# Altium PCB PCB1.PcbDoc
Units mm, origin at the board's own origin, x right, y up, seen from the top; angles counter-clockwise.
Board outline 50 x 45 mm, 2 copper layers (Top Layer, Bottom Layer); 24 components, 15 nets, 51 pads, 4 vias.
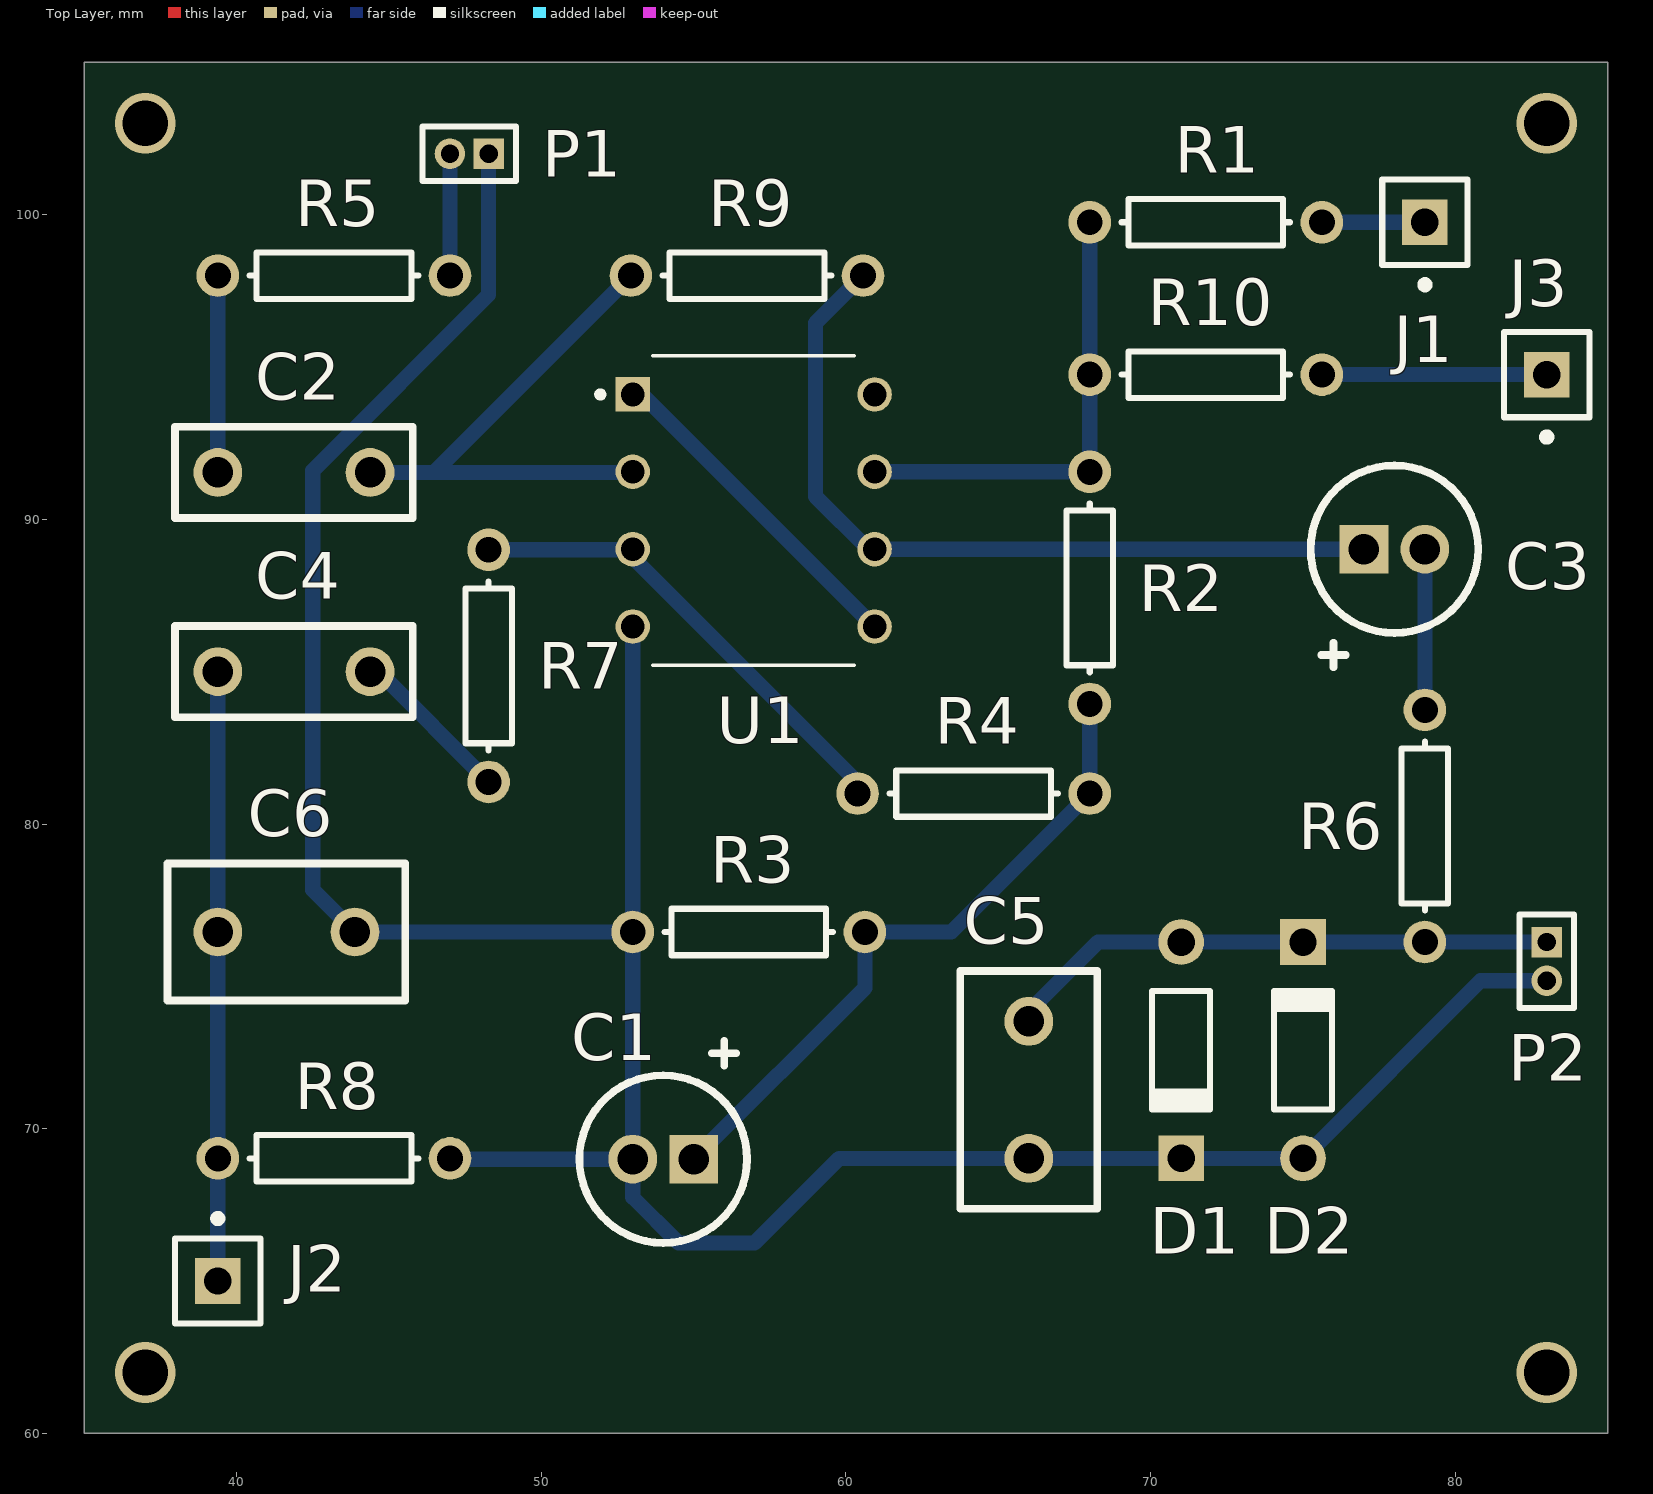
[diagram p0: Top Layer view]
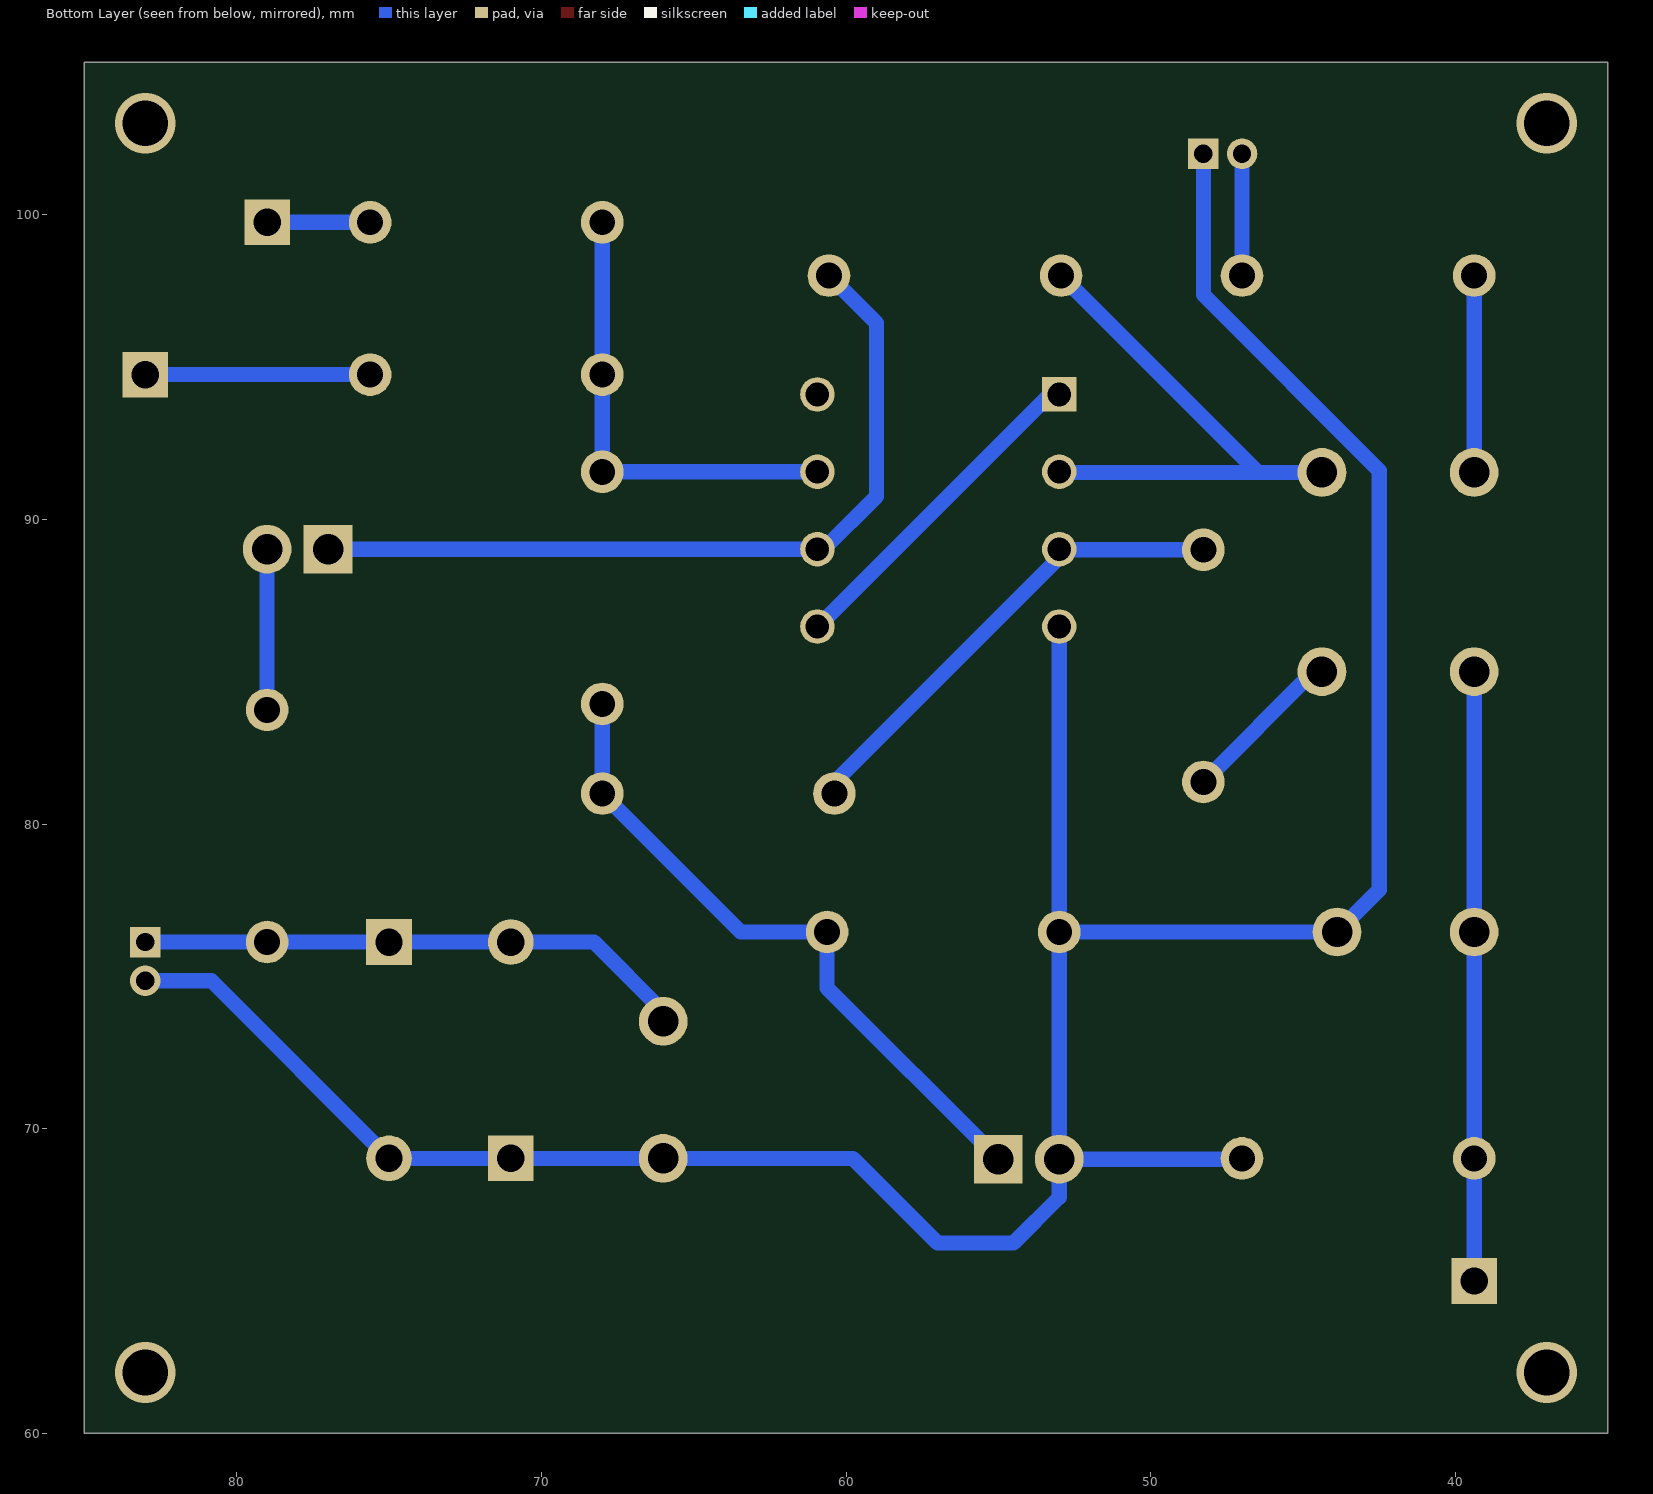
[diagram p1: Bottom Layer view, seen from below]

## Layer stack, top to bottom
Top Solder: solder mask 0.0102, Solder Resist, Dk 3.5
Top Layer: signal copper 0.0356
Dielectric 1: dielectric 0.32, FR-4, Dk 4.8
Bottom Layer: signal copper 0.0356
Bottom Solder: solder mask 0.0102, Solder Resist, Dk 3.5

## Board outline
35,60 35,105 85,105 85,60

## Design rules (kind name [scope] priority, off if disabled: settings)
Clearance [All] p1: gap=0.254 ignorepadtopadclearanceinfootprint=FALSE except(0: Arc-Hole Track-Hole SMDPad-Hole THPad-Hole Via-Hole Fill-Hole Poly-Hole Region-Hole Text-Hole)
PolygonConnect [All] p1: connectstyle=Relief reliefconductorwidth=0.254 reliefentries=4 polygonreliefangle="90 Angle" airgapwidth=0.254
RoutingVias [All] p1: holewidth=0.711 width=1.27 viastyle="Through Hole" minholewidth=0.711 minwidth=1.27 maxholewidth=0.711 maxwidth=1.27
SolderMaskExpansion [All] p1: expansion=0.102
Width [All] p1: maxlimit=0.5 minlimit=0.254 preferedwidth=0.5
30 further rules are at their usual default settings.

## Components (designator, comment, footprint, x,y, rotation, side; value= is the part's Value field where it differs from the comment)
C1 "Cap Pol1" PCBComponent_1#1 54,68.975 r0 top value=100pF
C2 "Cap" PCBComponent_1#2 39.255,91.515 r0 top value=0.047uF
C3 "Cap Pol1" PCBComponent_1#1 78,89.045 r180 top value=22uF
C4 "Cap" PCBComponent_1#2 39.255,84.975 r0 top value=0.01uF
C5 "Cap" PCBComponent_1#3 64.095,73.525 r270 top value=0.0022uF
C6 "Cap" PCBComponent_1#3 39.382,74.55 r0 top value=0.0022uF
D1 "Diode 1N914" DO-35 71,72.575 r270 top
D2 "Diode 1N914" DO-35 75,72.575 r90 top
J1 "Socket" PIN1 79,99.75 r180 top
J2 "Socket" PIN1 39.382,65 r0 top
J3 "Socket" PIN1 83,94.75 r180 top
P1 "MHDR1X2" MHDR1X2 48.27,102 r180 top
P2 "MHDR1X2" MHDR1X2 83,76.125 r270 top
R1 "Res1" AXIAL-0.3 71.81,99.75 r180 top value=100
R2 "Res1" AXIAL-0.3 68,87.75 r270 top value=20k
R3 "Res1" AXIAL-0.3 56.81,76.455 r180 top value=20k
R4 "Res1" AXIAL-0.3 64.19,81 r180 top value=470k
R5 "Res1" AXIAL-0.3 43.192,98 r180 top value=47k
R6 "Res1" AXIAL-0.3 79,79.935 r270 top value=10k
R7 "Res1" AXIAL-0.3 48.27,85.19 r90 top value=10k
R8 "Res1" AXIAL-0.3 43.192,69.025 r0 top value=1M5
R9 "Res1" AXIAL-0.3 56.75,98 r0 top value=1M
R10 "Res1" AXIAL-0.3 71.81,94.75 r180 top value=1k
U1 "LM741CN/NOPB" *DIP794W45P254L1016H508Q8 56.97,90.29 r0 top

## Footprints (in the part's own frame and the unit in brackets; to place one, negate y for a bottom-side part, rotate by r counter-clockwise, add the part's x,y. Pads: shape width x height; smd on the part's side, far side on the other; paste and mask are expansions set on the pad)
*DIP794W45P254L1016H508Q8 [mm]
  rect 1.13x1.13 hole 0.78: 1(-3.97,3.81)
  round 1.13 hole 0.78: 2(-3.97,1.27) 3(-3.97,-1.27) 4(-3.97,-3.81) 5(3.97,-3.81) 6(3.97,-1.27) 7(3.97,1.27) 8(3.97,3.81)
  silkscreen extent -5.13,-5.08 3.3,5.08
AXIAL-0.3 [mm] "Axial Device, Thru-Hole; 2 Leads; 0.3 in Pin Spacing"
  round 1.4 hole 0.85: 1(-3.81,0) 2(3.81,0)
  silkscreen extent -2.77,-0.76 2.77,0.76
DO-35 [mm] "Diode, Axial; Body 3.8 x 1.9 mm (LxDia. max), Lead Dia. 0.53 mm (max)"
  round 1.5 hole 0.9: 1(-3.55,0)
  rect 1.5x1.5 hole 0.9: 2(3.55,0)
  silkscreen extent -1.95,-0.95 2.05,0.95
MHDR1X2 [mm] "Connector; Header; 2 Position"
  rect 1x1 hole 0.6: 1(0,0)
  round 1 hole 0.6: 2(1.27,0)
  silkscreen extent -0.9,-0.9 2.17,0.9
PCBComponent_1#1 [mm]
  rect 1.6x1.6 hole 1: 1(1,0.025)
  round 1.6 hole 1: 2(-1,0.025)
  silkscreen extent -2.75,-2.72 2.75,3.9
PCBComponent_1#2 [mm]
  round 1.6 hole 1: 1(0.127,0.025) 2(5.125,0.025)
  silkscreen extent -1.28,-1.47 6.52,1.53
PCBComponent_1#3 [mm]
  round 1.6 hole 1: 1(0,1.905) 2(4.5,1.905)
  silkscreen extent -1.65,-0.35 6.15,4.16
PIN1 [mm] "Connector; Plug"
  rect 1.5x1.5 hole 0.9: 1(0,0)
  silkscreen extent -1.4,-1.4 1.4,2.17

## Part data
C1 C3: "Polarized Capacitor (Radial)", LatestRevisionDate=17-Jul-2002, LatestRevisionNote="Re-released for DXP Platform.", PackageDescription="Polarized Capacitor (Radial); 2 Leads", PackageReference=RB7.6-15, Published=8-Jun-2000, Publisher="Altium Limited"
C2 C4 C5 C6: "Capacitor", LatestRevisionDate=17-Jul-2002, LatestRevisionNote="Re-released for DXP Platform.", PackageDescription="Radial Cap, Thru-Hole; 2 Leads; 0.3 in Pin Spacing", PackageReference=RAD-0.3, Published=8-Jun-2000, Publisher="Altium Limited"
D1 D2: "High Conductance Fast Diode", Code_JEDEC=DO-204-AH, ComponentLink1Description="Manufacturer Link", ComponentLink1URL=http://www.fairchildsemi.com/, ComponentLink2Description=Datasheet, ComponentLink2URL=http://www.fairchildsemi.com/ds/1N%2F1N4448.pdf, DatasheetVersion=1997, LatestRevisionDate=17-Jul-2002, LatestRevisionNote="Re-released for DXP Platform.", PackageDescription="Diode, Axial; Body 3.8 x 1.9 mm (LxDia. max), Lead Dia. 0.53 mm (max)", PackageReference=DO-35, Published=8-Jun-2000, Publisher="Altium Limited"
P1 P2: "Header, 2-Pin", LatestRevisionDate=17-Jul-2002, LatestRevisionNote="Re-released for DXP Platform.", Publisher="Altium Limited"
R1 R2 R3 R4 R5 R6 R7 R8 R9 R10: "Resistor", LatestRevisionDate=17-Jul-2002, LatestRevisionNote="Re-released for DXP Platform.", PackageDescription="Axial Device, Thru-Hole; 2 Leads; 0.3 in Pin Spacing", PackageReference=AXIAL-0.3, Published=8-Jun-2000, Publisher="Altium Limited"
U1: "General Purpose Amplifier 1 Circuit 8-PDIP", Package="DIP-8 Microsemi", Availability=Unavailable, MF="Texas Instruments", MP=LM741CN/NOPB, Price=None, SnapEDA_Link=https://www.snapeda.com/parts/LM741CN/NOPB/Texas%20Instruments/view-part/74633/?ref=snap
J1 J2 J3: LatestRevisionDate=17-Jul-2002, LatestRevisionNote="Re-released for DXP Platform.", Publisher="Altium Limited"

## Via types
v1: diameter 2, hole 1.5, Top Layer to Bottom Layer, 4 vias

## Nets (pads, with @x,y where several pads share a name; then routed paths per layer and width w, separated by ;. In a path a pad name is that pad's centre, name@x,y a point inside that pad or via, vN(x,y) a via of type N, cw(c..) or ccw(c..) an arc to the next point about the centre after c; other vN are vias at no path point)
GND: C1.2 C5.2 C6.2 D1.2 D2.1 P1.1 P2.2 R3.2 R8.2 U1.4 | length 96.5
  Bottom Layer w0.5: R8.2 47.027,69 C1.2 ; P1.1 48.27,97.37 42.5,91.6 42.5,77.837 C6.2 R3.2 ; U1.4 R3.2 ; P2.2 80.83,74.855 D2.1 D1.2 C5.2 59.775,69.025 57,66.25 54.5,66.25 53,67.75 C1.2 ; C1.2 R3.2
NetC1_1: C1.1 R2.2 R3.1 R4.1 | length 22
  Bottom Layer w0.5: C1.1 60.62,74.62 R3.1 63.455,76.455 R4.1 R2.2
NetC2_1: C2.1 R5.2 | length 6.5
  Bottom Layer w0.5: C2.1 R5.2
NetC2_2: C2.2 R9.1 U1.2 | length 17.8
  Bottom Layer w0.5: C2.2 46.48,91.54 ; R9.1 46.48,91.54 ; U1.2@53,91.54 46.48,91.54
NetC3_1: C3.1 R9.2 U1.6 | length 26.6
  Bottom Layer w0.5: R9.2 59,96.44 59,90.75 60.73,89.02 U1.6 C3.1
NetC3_2: C3.2 R6.1 | length 5.3
  Bottom Layer w0.5: R6.1 C3.2
NetC4_1: C4.1 C6.1 J2.1 R8.1 | length 19.5
  Bottom Layer w0.5: J2.1 R8.1 C6.1 C4.1@39.382,84.55
NetC4_2: C4.2 R7.1 | length 5.7
  Bottom Layer w0.5: C4.2 44.65,85 R7.1 R7.1@48.27,81.73
NetC5_1: C5.1 D1.1 D2.2 P2.1 R6.2 | length 18.3
  Bottom Layer w0.5: C5.1 66,73.855 68.27,76.125 D1.1 D2.2 R6.2 P2.1
NetJ1_1: J1.1 R1.1 | length 3.4
  Bottom Layer w0.5: R1.1 J1.1
NetJ3_1: J3.1 R10.1 | length 7.4
  Bottom Layer w0.5: R10.1 J3.1
NetP1_2: P1.2 R5.1 | length 4
  Bottom Layer w0.5: P1.2 47,98.002 R5.1
NetR1_2: R1.2 R2.1 R10.2 U1.7 | length 15.2
  Bottom Layer w0.5: U1.7 R2.1 R10.2 R1.2
NetR4_2: R4.2 R7.2 U1.3 | length 15.8
  Bottom Layer w0.5: R7.2 53,89 53,88.75 60.38,81.37 R4.2
NetU1_1: U1.1 U1.5 | length 11.1
  Bottom Layer w0.5: U1.1@53,94.08 53.32,94.08 U1.5@60.94,86.46
pads on no net: U1.8
copper on no net:
  other v1: 37,62 83,62 37,103 83,103

## Silkscreen, mask and mechanical layers (free items; w line width, h text height)
Board:
  the board outline again, w0.254

## Dimensions
85,60 to 85,105 on Mechanical 1
35,105 to 85,105 on Mechanical 1